# Altium PCB bmsSlavePCB_L.PcbDoc (part 3 of 3)
Units mil, origin at the board's own origin, x right, y up, seen from the top; angles counter-clockwise.
Board outline 6375 x 5335 mil, 2 copper layers (Top Layer, Bottom Layer); 224 components, 153 nets, 536 pads, 45 vias.
Unrouted connection lines stored in the file: 34.
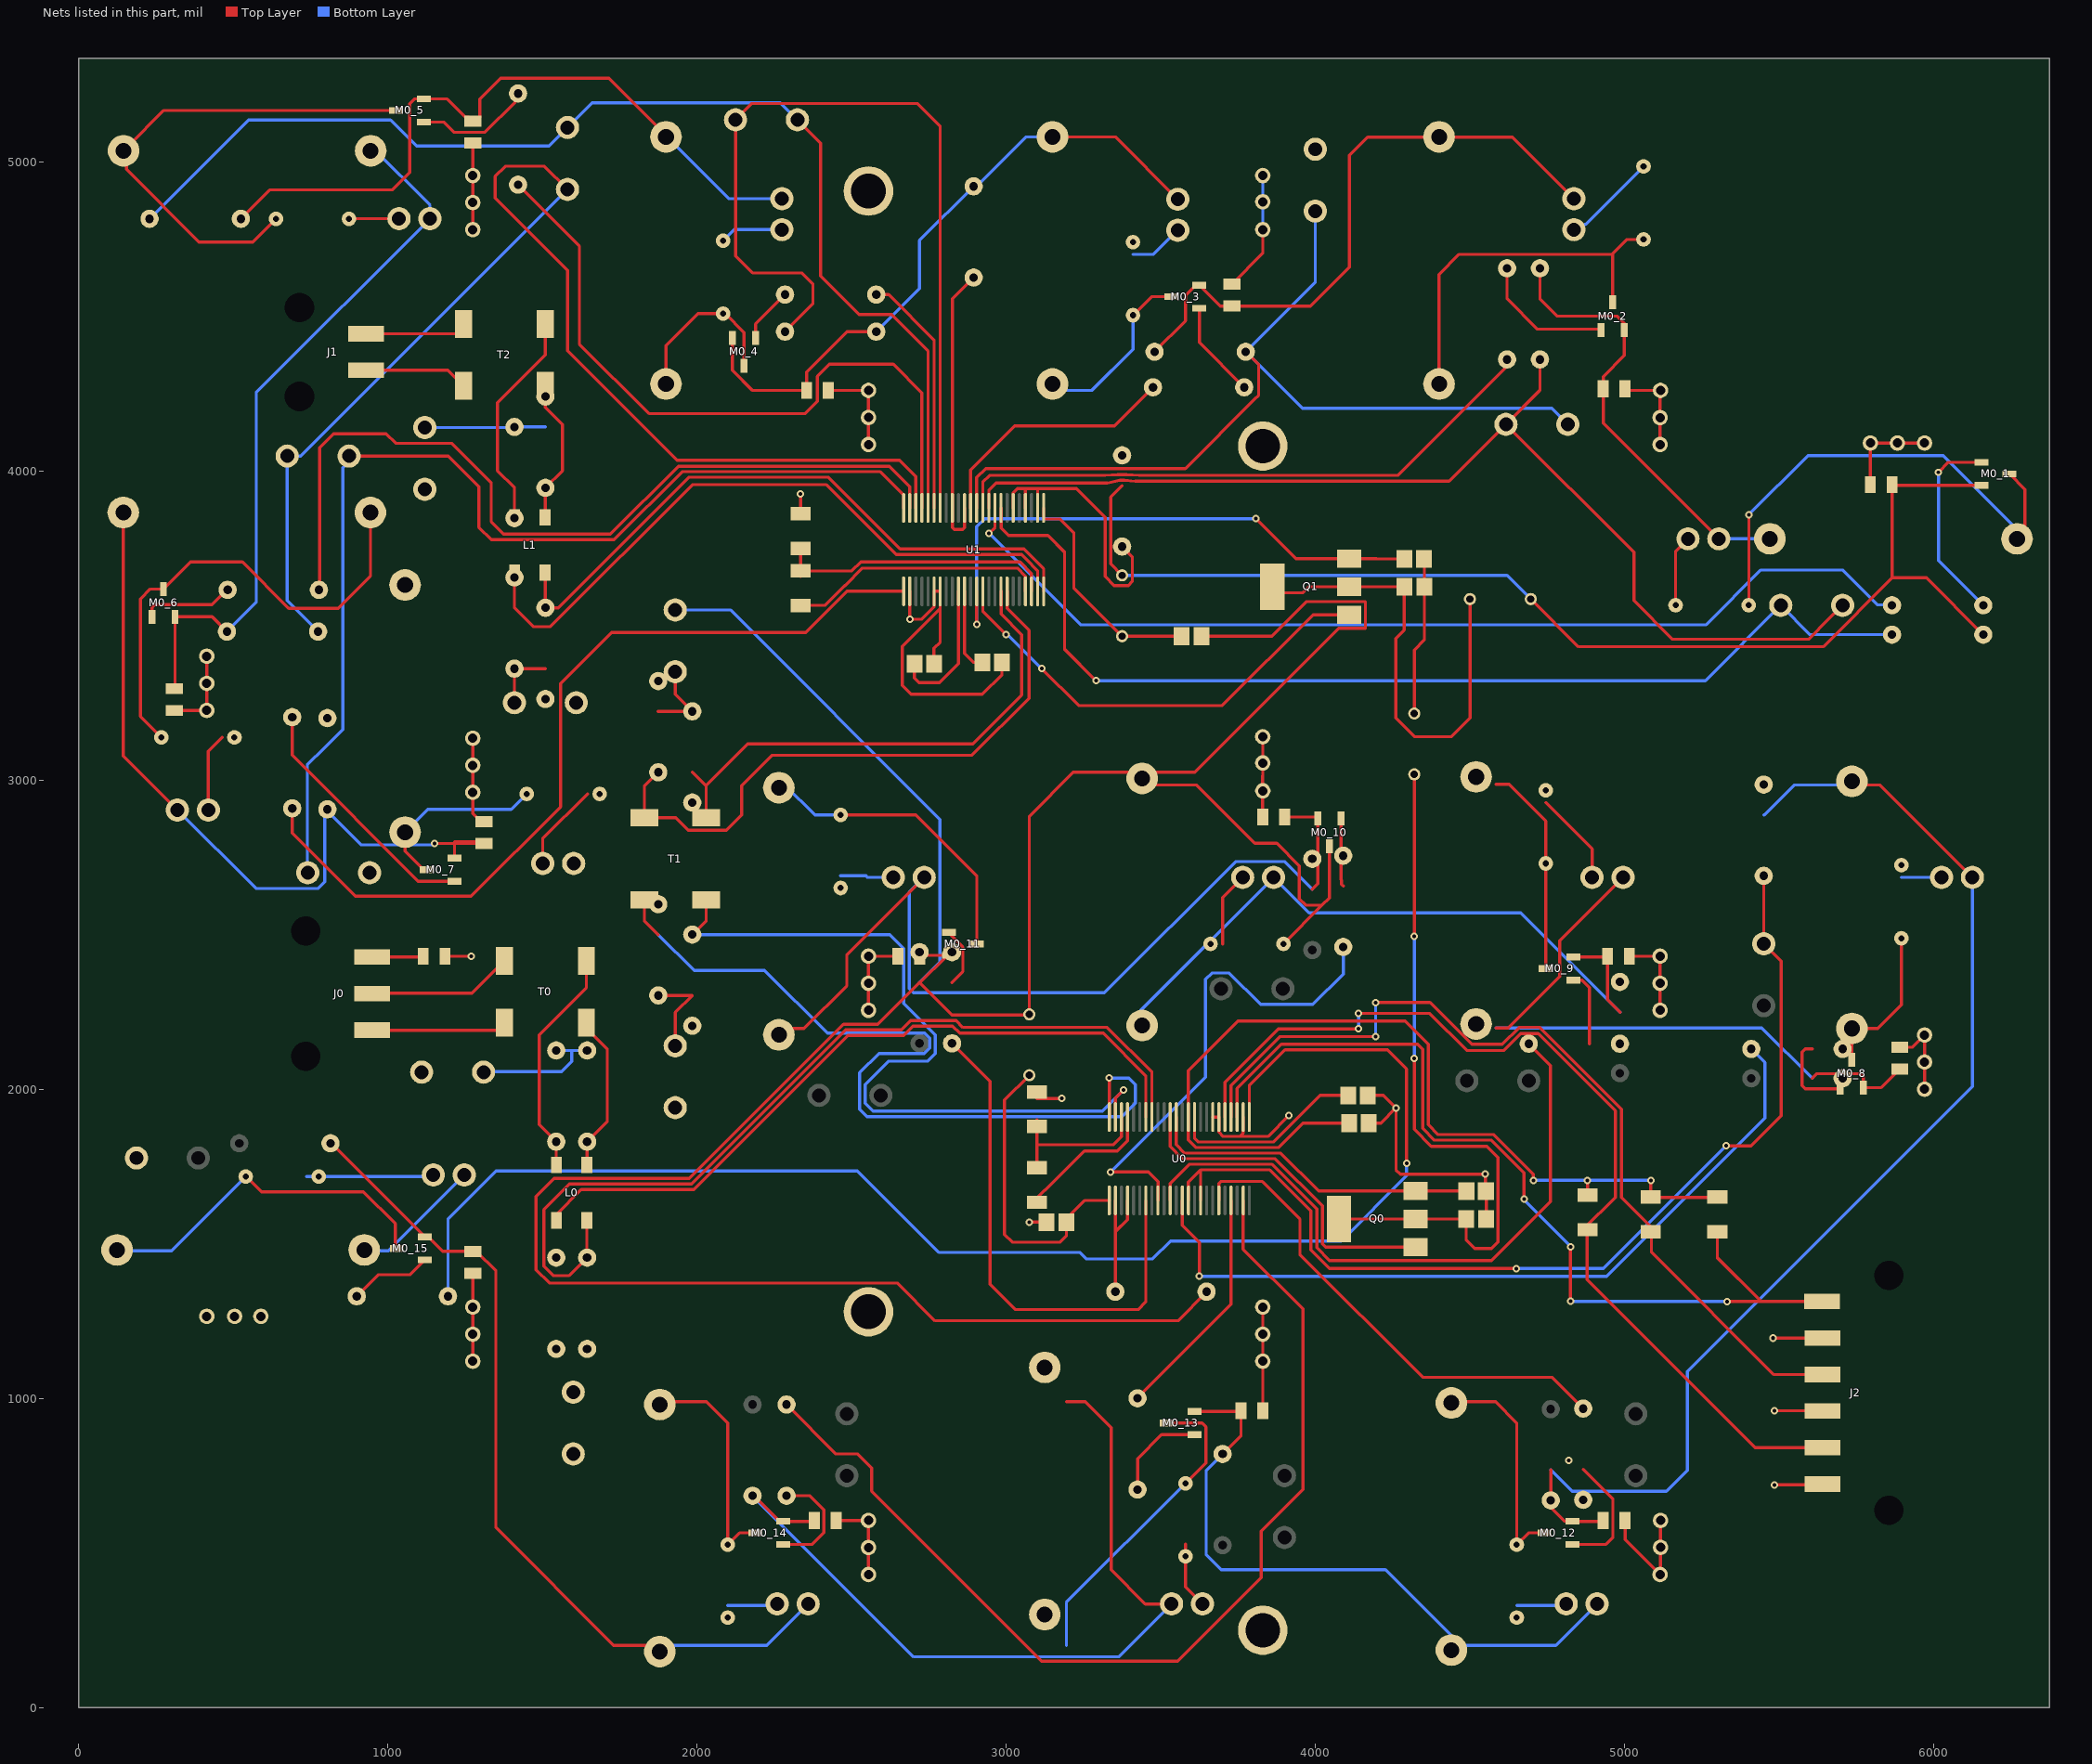
[diagram p2: the nets of this part, all layers, seen from the top]

## Via types
v1: diameter 24, hole 12, Top Layer to Bottom Layer, 45 vias

## Nets (pads, with @x,y where several pads share a name; then routed paths per layer and width w, separated by ;. In a path a pad name is that pad's centre, name@x,y a point inside that pad or via, vN(x,y) a via of type N, cw(c..) or ccw(c..) an arc to the next point about the centre after c; other vN are vias at no path point) (continued)
1-S1: R0_15.1 U0.25 | length 4671.5
  Top Layer w10: U0.25@3786.38,1909.84 3786.38,2011.38 3902,2127 4233,2127 4295,2065 v1(4295,1760)
  Bottom Layer w10: R0_15.1@1195,1330 1195,1579.25 1350.75,1735 2519,1735 2782,1472 3238,1472 3259,1451 3474,1451 3532,1509 4083.92,1509 4295,1720.08 v1(4295,1760)
1-S2: R0_14.1 U0.23 | length 3390.7
  Top Layer w10: R0_14.1@2290,980 2450,820 2520,820 2565,775 2565,700 3115,150 3555,150 3825,420 3825,570 3960,705 3960,1289.02 3766.69,1482.33 U0.23@3766.69,1640.16
1-S3: R0_13.1 U0.21 | length 764.8
  Top Layer w10: R0_13.1@3424.08,1000.92 3727.32,1304.17 U0.21@3727.32,1640.16
1-S4: R0_12.1 U0.19 | length 1607.7
  Top Layer w10: U0.19@3687.95,1640.16 3687.95,1683.47 3688.03,1683.54 3688.03,1695.53 3693.89,1701.39 3828.61,1701.39 3950,1580 3950,1465 4347,1068 4765.15,1068 R0_12.1@4866.3,966.85
1-S7: R0_8.1 U0.13 | length 2550.3
  Top Layer w10: U0.13@3569.84,1640.16 3569.84,1559.16 3625,1504 v1(3625,1395)
  Bottom Layer w10: v1(3625,1395) 4942,1395 5454,1907 5454,2086 R0_8.1@5410,2130
1-S8: R0_9.1 U0.11 | length 2131.1
  Top Layer w10: U0.11@3530.47,1640.16 3530.47,1695.47 3592.04,1757.04 3860.23,1757.04 4005,1612.27 4005,1487 4046,1446 4570,1446 4760,1636 4760,2076.85 R0_9.1@4690,2146.85
1-S9: R0_10.1 U0.9 | length 1601.3
  Top Layer w10: v1(3338,1732) 3460.1,1732 3491.1,1701 U0.9@3491.1,1640.16
  Bottom Layer w10: v1(3338,1732) 3644.74,2038.74 3644.74,2355 3665.24,2375.5 3721.5,2375.5 3823,2274 3992,2274 4090.24,2372.24 R0_10.1@4090.24,2460
1-S10: R0_11.1 U0.7 | length 1706.2
  Top Layer w10: R0_11.1@2825,2148.15 2948,2025.15 2948,1369 3030,1287 3426.54,1287 3451.73,1312.19 U0.7@3451.73,1640.16
2-C1: C0_6.1 C0_7.2 R1_7.1 U1.24 | length 3552
  Top Layer w10: C0_6.1@875,4047.61 1196.39,4047.61 1295,3949 1295,3817 1335,3777 1732,3777 1952,3997 2593,3997 2666.93,3923.07 2668.54,3923.07 2668.62,3922.99 U1.24@2668.62,3879.84
  Bottom Layer w10: C0_7.2@741.3,2700 740,2701.3 740,3048.7 796.3,3105 855,3163.7 855,4010.02 875,4030.02 C0_6.1@875,4047.61
2-C2: C0_5.1 C0_6.2 R1_6.1 U1.22 | length 4209
  Top Layer w10: C0_5.1@1581.62,4910.38 1507,4985 1380,4985 1347.36,4952.36 1347.36,4882.64 1350.29,4879.71 1582,4648 1582,4388 1936,4034 2655,4034 2707.99,3981.01 U1.22@2707.99,3879.84
  Bottom Layer w10: R1_6.1@775,3480 675,3580 C0_6.2@675,4047.61 718.84,4047.61 C0_5.1@1581.62,4910.38
2-C3: C0_4.1 C0_5.2 R1_5.1 U1.20 | length 3834.8
  Top Layer w10: C0_4.1@2325,5135 2400,5060 2400,4630 2525,4505 2630,4505 2747.36,4387.64 U1.20@2747.36,3879.84
  Bottom Layer w10: R1_5.1@230,4815 550,5135 1009,5135 1093.62,5050.38 1521.62,5050.38 C0_5.2@1581.62,5110.38 1661.23,5190 2270,5190 C0_4.1@2325,5135
2-C4: C0_4.2 R1_4.1 U1.18 | length 2867.7
  Top Layer w10: R1_4.1@2285,4450 2375,4540 2375,4604.14 2339.14,4640 2180,4640 2125,4695 C0_4.2@2125,5135 2178,5188 2713,5188 2786.73,5114.27 U1.18@2786.73,3879.84
2-C7: C0_2.1 C0_3.2 R1_3.1 U1.12 | length 2964.9
  Top Layer w10: U1.12@2904.84,3879.84 2904.84,3978 2934.31,4007.47 3579.47,4007.47 3802.69,4230.69 3816.76,4244.75 3816.76,4343.24 R1_3.1@3775,4385
  Bottom Layer w10: C0_3.2@4000,4840 4000,4610 R1_3.1@3775,4385 3958,4202 3985,4202 4764.3,4202 C0_2.1@4816.3,4150
2-C8: C0_1.1 C0_2.2 R1_2.1 U1.10 | length 3585.2
  Top Layer w10: U1.10@2944.21,3879.84 2944.21,3936.21 2968,3960 3326.32,3960 3367.54,3969.85 3382.46,3969.85 3417.68,3966 4432.3,3966 C0_2.2@4616.3,4150 ; R1_2.1@4726.3,4360 4726.3,4260 C0_2.2@4616.3,4150 ; C0_1.1@5705,3565 5661.71,3521.71 5595,3455 5155,3455 5030,3580 5030,3736.3 C0_2.2@4616.3,4150
2-C9: C0_1.2 R1_1.1 U1.8 | length 3475.2
  Top Layer w10: U1.8@2983.58,3879.84 2983.58,3815 3007.58,3791 3135,3791 3189,3737 3189,3423 v1(3291,3321)
  Bottom Layer w10: v1(3291,3321) 5261,3321 C0_1.2@5505,3565 5600,3470 R1_1.1@5865,3470
2-S1: R0_7.1 U1.25 | length 2785.5
  Top Layer w10: R0_7.1@691.3,2908.15 691.3,2827.7 895,2624 1270,2624 1559,2913 1559,3312 1724,3477 2352,3477 2486,3611 2668.62,3611 U1.25@2668.62,3610.16
2-S2: R0_6.1 U1.23 | length 2783.4
  Top Layer w10: R0_6.1@777.5,3615 780,3617.5 780,4075 825,4120 995,4120 1026,4089 1206,4089 1335,3960 1335,3835 1375,3795 1720,3795 1940,4015 2622.31,4015 2688.31,3949 U1.23@2688.31,3879.84
2-S3: R0_5.1 U1.21 | length 2323.1
  Top Layer w10: R0_5.1@1421.61,4925.38 1620,4727 1620,4410 1845,4185 2350,4185 2389,4224 2389,4305.21 2428.79,4345 2635,4345 2727.68,4252.32 U1.21@2727.68,3879.84
2-S4: R0_4.1 U1.19 | length 786.1
  Top Layer w10: R0_4.1@2585,4570 2620,4570 2767.05,4422.95 U1.19@2767.05,3879.84
2-S7: R0_3.1 U1.13 | length 823.7
  Top Layer w10: U1.13@2885.16,3879.84 2885.16,4003.16 3027,4145 3350,4145 R0_3.1@3475,4270
2-S8: R0_2.1 U1.11 | length 1964.6
  Top Layer w10: U1.11@2924.53,3879.84 2924.53,3963.12 2946.41,3985 3320.17,3985 3360.09,3987.85 3389.91,3987.85 3429.83,3985 4266.3,3985 R0_2.1@4641.3,4360
2-S9: R0_1.1 U1.9 | length 3252.8
  Top Layer w10: v1(2945,3798) 2963.9,3816.9 U1.9@2963.9,3879.84
  Bottom Layer w10: v1(2945,3798) 3241,3502 5264,3502 5441,3679 5704.15,3679 5816.58,3566.58 5863.42,3566.58 R0_1.1@5865,3565
GPIO1: J2.1 R35.1 U0.27 | length 2976.9
  Top Layer w10: U0.27@3747.01,1909.84 3747.01,2002.01 3890,2145 4330.36,2145 4347,2128.36 4347,1873 4385,1835 4569.54,1835 4675,1729.54 v1(4675,1645) ; v1(4825,1490) 4825.24,1489.76 4825.24,1314.76 v1(4825.47,1314.53) ; R35.1@5300,1538.9 5300,1455 5441.89,1313.11 ; v1(5331.89,1313.11) 5441.89,1313.11 ; J2.1@5638.82,1313.11 5441.89,1313.11
  Bottom Layer w10: v1(4675,1645) 4675,1642.5 4825,1492.5 v1(4825,1490) ; v1(4825.47,1314.53) 4826.18,1313.82 5331.18,1313.82 v1(5331.89,1313.11)
GPIO2: J2.3 R36.1 U0.28 | length 2967.4
  Top Layer w10: U0.28@3727.32,1909.84 3727.32,2012.32 3885,2170 v1(4195,2170) ; v1(4195,2280) 4370.86,2280 4505.86,2145 4604.54,2145 4659.54,2200 4725.46,2200 4990,1935.46 4990,1650 R36.1@5095.06,1544.94 ; R36.1@5070.31,1553.59 R36.1@5085,1538.9 5087,1536.89 5087,1472.89 5483,1076.89 J2.3@5640,1076.89
  Bottom Layer w10: v1(4195,2170) v1(4195,2280)
GPIO3: J2.5 R37.1 U0.29 | length 3263.4
  Top Layer w10: U0.29@3707.64,1909.84 3707.64,2022.64 3880,2195 v1(4140,2195) ; v1(4140,2245) 4370,2245 4490,2125 4610,2125 4664.54,2179.54 4720.46,2179.54 4970,1930 4970,1650 R37.1@4867.5,1547.5 ; R37.1@4880,1545.51 4879.26,1544.77 4879.26,1383.74 5422.33,840.67 J2.5@5640,840.67 ; R37.1@4883.22,1545.49 R37.1@4896.31,1558.57
  Bottom Layer w10: v1(4140,2195) v1(4140,2245)
IMA-1: L0.1 R9.1 U0.41 | length 2914.5
  Top Layer w10: L0.1@1644.21,1575.43 1644.21,1455.79 R9.1@1645,1455 1587,1397 1535,1397 1505,1427 1505,1610 1588,1693 1982.54,1693 2481.54,2192 2661.54,2192 2691.54,2222 2838,2222 2860,2200 3326.42,2200 3471.42,2055 U0.41@3471.42,1909.84
IMA-2: R39.2 T1.3 U1.41 | length 1685.9
  Top Layer w10: 1985,3025 2028.5,2981.5 ; T1.3@2044,2877.5 T1.3@2030,2877.5 2030,2980 2028.5,2981.5 ; U1.41@2983.58,3610.16 2983.58,3536.42 3050,3470 3050,3275 2892,3117 2164,3117 2028.5,2981.5
IMB-1: R33.1 T1.2 U0.47 | length 2518.2
  Top Layer w10: R33.1@1985,2500 2030,2545 T1.2@2030,2612.5 ; U0.47@3353.31,1909.84 3353.31,1971.31 v1(3380,1998)
  Bottom Layer w10: R33.1@1985,2500 2624,2500 2669,2455 2669,2276.69 2770.69,2175 2770.69,2115 2745.98,2090.29 2619.29,2090.29 2544,2015 2544,1955 2569.5,1929.5 3311.5,1929.5 v1(3380,1998)
IMB-2: L1.4 R11.2 U1.47 | length 2203.4
  Top Layer w10: L1.4@1410.79,3670.43 1410,3669.65 1410,3556.85 1470.85,3496 1526,3496 1985,3955 2418.91,3955 2644.91,3729 3050.54,3729 3065.27,3714.27 3065.27,3713.84 3101.69,3677.42 U1.47@3101.69,3610.16
In1-A: J0.2 T0.1 | length 471.4
  Top Layer w10: J0.2@950,2309.06 950.94,2310 1272.5,2310 T0.1@1377.5,2415
In1-B: J0.1 T0.2 | length 430.9
  Top Layer w10: J0.1@958.46,2190 1355,2190 1377.5,2212.5 T0.2@1377.5,2215
IPA-1: L0.4 R8.2 U0.42 | length 2377.5
  Top Layer w10: L0.4@1545.79,1575.43 1545.79,1594.79 1626,1675 1990,1675 2489,2174 2669,2174 2699,2204 2826.84,2204 2850,2180.84 3313.9,2180.84 3451.73,2043 U0.42@3451.73,1909.84
IPA-2: R38.1 T1.4 U1.42 | length 2034.3
  Top Layer w10: R38.1@1875,3025 1830,2980 T1.4@1830,2877.5 1931.5,2877.5 1972,2837 2095,2837 2145.16,2887.16 2145.16,2981.16 2244,3080 2890,3080 3074,3264 3074,3484 3003.27,3554.73 U1.42@3003.27,3610.16
IPB-1: R32.2 T1.1 U0.48 | length 2757.3
  Top Layer w10: T1.1@1830,2612.5 1830,2545 1875,2500 ; U0.48@3333.62,1909.84 v1(3333.62,2036)
  Bottom Layer w10: 1875,2500 1991,2384 2219,2384 2422.16,2180.84 2736.85,2180.84 2752.69,2165 2752.69,2133.15 2735,2115.46 2588.46,2115.46 2526,2053 2526,1935 2550,1911 3375,1911 3418,1954 3418,2015 3397,2036 v1(3333.62,2036)
IPB-2: L1.1 R10.1 U1.48 | length 2096
  Top Layer w10: L1.1@1509.21,3670.43 1510,3669.65 R10.1@1510,3556.85 1551.85,3556.85 1974,3979 2426,3979 2657.39,3747.61 3057.39,3747.61 3121.38,3683.62 U1.48@3121.38,3610.16
NetC0_2: C0.2 R0.1 U0.1 | length 985.4
  Top Layer w10: R0.1@3075,2045 2995,1965 2995,1530 3020,1505 3175,1505 3195,1525 3195,1580.16 3255,1640.16 U0.1@3333.62,1640.16
NetC0_3_1: C0_3.1
NetC1_1: C1.1 Q0.2 Q0.4 R3.1 | length 2332.5
  Top Layer w10: Q0.4@4075.98,1580 Q0.2@4324.02,1580 C1.1@4487.52,1580 4487.52,1512.48 4515,1485 4570,1485 4591.07,1506.07 4591.07,1778.93 4555,1815 4375,1815 4320,1870 v1(4320,2100) ; v1(4320,2495) R3.1@4320,3018.15
  Bottom Layer w10: v1(4320,2100) v1(4320,2495)
NetC2_2: C2.2 Q0.3 U0.37 | length 1090.1
  Top Layer w10: U0.37@3550.16,1909.84 3550.16,1820.3 3577.41,1793.04 3888.25,1793.04 4010.75,1670.55 Q0.3@4324.02,1670.55 4487.95,1670.55 C2.2@4488.5,1670
NetC4_2: C4.2 U0.34 | length 634
  Top Layer w10: U0.34@3609.21,1909.84 3609.21,1841.24 3621.41,1829.04 3864.04,1829.04 4015,1980 C4.2@4107.01,1980
NetC14_1: C14.1 R32.1 R33.2 | length 295.9
  Top Layer w10: R32.1@1875,2303.15 1985,2303.15 1930,2248.15 C14.1@1930,2140
NetC16_2: C16.2 R38.2 R39.1 | length 260.9
  Top Layer w10: 1875,3221.85 R39.1@1985,3221.85 1930,3276.85 C16.2@1930,3350
NetC17_2: C17.2 R41.1 U1.1 | length 743.8
  Top Layer w10: U1.1@3121.38,3879.84 3121.38,3844 3175,3844 3219,3800 3219,3621 R41.1@3375,3465 C17.2@3567.52,3465
NetC18_1: C18.1 Q1.2 Q1.4 R43.1 | length 1565.6
  Top Layer w10: Q1.4@3860.98,3625 3860.98,3605.22 3959.21,3605.22 3978.99,3625 Q1.2@4109.02,3625 C18.1@4287.52,3625 4287.52,3485.05 4260,3457.53 4260,3200 4320,3140 4440,3140 4500,3200 R43.1@4500,3585
NetC19_2: C19.2 Q1.3 U1.37 | length 1871.3
  Top Layer w10: v1(2904.84,3503) U1.37@2904.84,3610.16 ; v1(3808,3845) 3937.45,3715.55 Q1.3@4109.02,3715.55 4198,3715.55 4198.55,3715 C19.2@4288.5,3715
  Bottom Layer w10: v1(2904.84,3503) 2904.84,3818.84 2931,3845 v1(3808,3845)
NetC20_2: C20.2 U1.35 | length 270.9
  Top Layer w10: U1.35@2865.47,3610.16 2865.47,3409.53 2895,3380 C20.2@2923.5,3380
NetC21_2: C21.2 U1.34 | length 453.5
  Top Layer w10: C21.2@2703.5,3375 2703.5,3329.28 2717.79,3315 2785,3315 2845.79,3375.79 U1.34@2845.79,3610.16
NetC22_2: C22.2 R6.1 R7.2 | length 434.5
  Bottom Layer w10: C22.2@1310,2055 1311.85,2056.85 1561.85,2056.85 1595,2090 1595,2125 ; R6.1@1545,2125 1595,2125 ; R7.2@1645,2125 1595,2125
NetC23_2: C23.2 R8.1 R9.2 | length 2.2
  Bottom Layer w10: R9.2@1643.43,1166.58 R9.2@1645,1168.15
NetC24_2: C24.2 R10.2 R11.1 | length 210
  Top Layer w10: C24.2@1410,3250 R11.1@1410,3360 1510,3360
NetC25_2: C25.2 R12.2 R13.1 | length 390.8
  Bottom Layer w10: C25.2@1120,4140 1408.15,4140 R13.1@1410,4141.85 1510,4141.85
NetD0_1_1: D0_1.1 R3_1.2 | length 231.6
  Top Layer w10: R3_1.2@5165,3565 5165,3740 D0_1.1@5205,3780
NetD0_1_2: D0_1.2 F0_2.1 M0_2.2 R1_2.2 R2_1.1 | length 1440.2
  Top Layer w10: R1_2.2@4726.3,4655 4726.3,4556.85 4783.15,4500 4976.3,4500 4998.7,4477.6 M0_2.2@4998.7,4455 4998.7,4372.64 4931.06,4305 F0_2.1@4931.06,4265 4931.06,4153.94 D0_1.2@5305,3780
  Bottom Layer w10: D0_1.2@5305,3780 R2_1.1@5461.3,3780
NetD0_2_1: D0_2.1 R3_2.2 | length 309.7
  Bottom Layer w10: D0_2.1@4836.3,4780 4853.89,4780 4870.7,4796.81 4873.74,4796.81 R3_2.2@5061.3,4984.37
NetD0_2_2: D0_2.2 F0_3.1 M0_3.2 R1_3.2 R2_2.1 | length 2041.9
  Top Layer w10: R1_3.2@3480,4385 3580,4485 3580,4567.05 3613.5,4600.55 M0_3.2@3625,4600.55 3692.64,4532.91 F0_3.1@3730,4532.91 3983.91,4532.91 4110,4659 4110,5020 4169.21,5079.21 4395,5079.21 4637.09,5079.21 D0_2.2@4836.3,4880
NetD0_3_1: D0_3.1 R3_3.2 | length 177.4
  Bottom Layer w10: 3410,4700 3476.85,4700 D0_3.1@3555,4778.15
NetD0_3_2: D0_3.2 F0_4.1 M0_4.2 R1_4.2 R2_3.1 R58.2 | length 2109
  Top Layer w10: M0_4.2@2115,4430 2115,4325 2180,4260 F0_4.1@2354.76,4260 2355,4260.24 2355,4320 2485,4450 R1_4.2@2580,4450 ; R2_3.1@3199.03,5080 3353.15,5080 D0_3.2@3555,4878.15
  Bottom Layer w10: R1_4.2@2580,4450 2720,4590 2720,4745 R58.2@2895,4920 ; R58.2@2900,4915 3065,5080 R2_3.1@3150,5080 ; R2_3.1@3155,5086.85 R2_3.1@3195,5086.85
NetD0_4_1: D0_4.1 R3_4.2 | length 204.9
  Bottom Layer w10: R3_4.2@2084.69,4744.69 2120,4780 D0_4.1@2275,4780
NetD0_4_2: D0_4.2 F0_5.1 M0_5.2 R1_5.2 R2_4.1 | length 2301.1
  Top Layer w10: R1_5.2@525,4815 618.38,4908.38 1014.62,4908.38 1071.62,4965.38 1071.62,5187.79 1086.62,5202.79 M0_5.2@1116.62,5202.79 1192.21,5202.79 1251.77,5143.23 1262.24,5143.23 F0_5.1@1275,5130.47 1284.74,5130.47 1297.5,5143.23 1297.5,5202.5 1365,5270 1715,5270 1900,5085 R2_4.1@1900,5080
  Bottom Layer w10: R2_4.1@1920,5063.7 2103.7,4880 D0_4.2@2275,4880
NetD0_5_1: D0_5.1 R3_5.2 | length 153.6
  Top Layer w10: R3_5.2@883.05,4815.38 D0_5.1@1036.62,4815.38
NetD0_5_2: D0_5.2 F0_6.1 M0_6.2 R1_6.2 R2_5.1 | length 2335.2
  Top Layer w10: F0_6.1@310,3295.24 312.4,3297.64 M0_6.2@312.4,3527.61 432.39,3527.61 R1_6.2@480,3480
  Bottom Layer w10: R1_6.2@480,3480 575,3575 575,4253.77 D0_5.2@1136.62,4815.38 1136.62,4859.08 R2_5.1@950.32,5045.38
NetD0_6_1: D0_6.1 R3_6.2 | length 253.6
  Top Layer w10: D0_6.1@420,2902.61 420,3092.61 465,3137.61
NetD0_6_2: D0_6.2 F0_7.1 M0_7.2 R1_7.2 R2_6.1 | length 2578.6
  Top Layer w10: R2_6.1@145,3865 145,3077.61 D0_6.2@320,2902.61 ; v1(1151.06,2794.76) 1216.3,2794.76 ; M0_7.2@1216.3,2747.4 1216.3,2794.76 ; 1216.3,2794.76 F0_7.1@1311.3,2794.76 1306.06,2800 1216.3,2800 1216.3,2794.76
  Bottom Layer w10: D0_6.2@320,2902.61 573.61,2649 775,2649 796.3,2670.3 796.3,2810 796.3,2908.15 914.45,2790 1146.3,2790 v1(1151.06,2794.76)
NetD0_7_1: D0_7.1 R3_7.2 | length 285.1
  Top Layer w10: D0_7.1@1501.3,2730 1501.3,2810 1646.3,2955
NetD0_8_1: D0_8.1 R3_8.2 | length 130
  Bottom Layer w10: 5895,2685 D0_8.1@6025,2685
NetD0_8_2: D0_8.2 F0_12.1 M0_12.2 R1_12.2 R2_8.1 R14.2 | length 3949.8
  Top Layer w10: 4761.3,768.15 4761.3,647.4 4806.3,602.4 M0_12.2@4831.3,602.4 4831.3,602 4931.06,602 F0_12.1@4931.06,605 ; R2_8.1@5735,2983.7 5826.3,2983.7 D0_8.2@6125,2685
  Bottom Layer w10: 4761.3,768.15 4830.45,699 5135,699 5203,767 5203,1087 6125,2009 D0_8.2@6125,2685 ; 5450,2886.85 5451.85,2886.85 5548.7,2983.7 R2_8.1@5735,2983.7
NetD0_9_1: D0_9.1 R3_9.2 | length 304
  Top Layer w10: 4745,2926.85 4895,2776.85 D0_9.1@4895,2685
NetD0_9_2: D0_9.2 F0_8.1 M0_8.2 R1_8.2 R2_9.1 | length 2122.4
  Top Layer w10: 4585,2198.15 4624.34,2198.15 4790,2363.81 4790,2480 D0_9.2@4995,2685 ; 5606.85,2035 5621.85,2050 5762.4,2050 5772.4,2040 M0_8.2@5772.4,2005 5830.24,2005 F0_8.1@5890,2064.76
  Bottom Layer w10: 4585,2198.15 5443.7,2198.15 5606.85,2035
NetD0_10_1: D0_10.1 R3_10.2 | length 241.8
  Top Layer w10: 3700.24,2470 3700.24,2620.24 D0_10.1@3765,2685
NetD0_10_2: D0_10.2 F0_9.1 M0_9.2 R1_9.2 R2_10.1 | length 2276.2
  Top Layer w10: M0_9.2@4835,2427.4 4942.17,2427.4 F0_9.1@4944.76,2430 4945,2427.4 4945,2288.7 4985,2248.7
  Bottom Layer w10: R2_10.1@3435.24,2196.3 3435.24,2255.24 D0_10.2@3865,2685 3980,2570 4663.7,2570 4985,2248.7
NetD0_11_1: D0_11.1 R3_11.2 | length 172.1
  Bottom Layer w10: 2465,2690 2547,2690 2552,2685 D0_11.1@2635,2685
NetD0_11_2: D0_11.2 F0_10.1 M0_10.2 R1_10.2 R2_11.1 | length 2957.2
  Top Layer w10: R2_11.1@2285,2196.3 2346.3,2196.3 2485,2335 2485,2435 D0_11.2@2735,2685 ; F0_10.1@3900.24,2880 4002.83,2880 M0_10.2@4007.83,2875 4007.83,2664.45 3990.24,2646.85
  Bottom Layer w10: D0_11.2@2735,2685 2687,2637 2687,2325 2700,2312 3318,2312 3742,2736 3901.09,2736 3990.24,2646.85
NetD0_12_1: D0_12.1 R3_12.2 | length 162.1
  Bottom Layer w10: 4651.3,330 4806.3,330 D0_12.1@4811.3,335
NetD0_12_2: D0_12.2 F0_13.1 M0_13.2 R1_13.2 R2_12.1 | length 2119.8
  Top Layer w10: M0_13.2@3610,957.4 3757.17,957.4 F0_13.1@3759.76,960 ; R1_13.2@3700,820 3759.76,879.76 F0_13.1@3759.76,955
  Bottom Layer w10: R1_13.2@3714.36,834.36 3647,767 3647,494 3695,446 4226.6,446 4471.3,201.3 4777.6,201.3 D0_12.2@4911.3,335
NetD0_13_1: D0_13.1 R3_13.2 | length 215.9
  Top Layer w10: 3580,528.15 3580,390 D0_13.1@3635,335
NetD0_13_2: D0_13.2 F0_14.1 M0_14.2 R1_14.2 R2_13.1 | length 2759
  Top Layer w10: R1_14.2@2180,685 2185.67,685 2268.26,602.4 M0_14.2@2279.76,602.4 2279.76,602 2379.53,602 F0_14.1@2379.53,605 ; 3195,988.7 3256.3,988.7 3340,905 3340,445 3450,335 D0_13.2@3535,335
  Bottom Layer w10: R1_14.2@2180,685 2701,164 3364,164 D0_13.2@3535,335
NetD0_14_1: D0_14.1 R3_14.2 | length 162.1
  Bottom Layer w10: 2099.76,330 2254.76,330 D0_14.1@2259.76,335
NetD0_14_2: D0_14.2 F0_15.1 M0_15.2 R1_15.2 R2_14.1 | length 2763.1
  Top Layer w10: R1_15.2@815,1825 817.93,1825 1112.91,1530.02 1112.91,1523.4 1118.91,1517.4 1135.16,1517.4 1177.32,1475.24 F0_15.1@1275,1475.24 ; F0_15.1@1275,1474.8 1288,1474.8 1350,1412.8 1350,582 1730.7,201.3 R2_14.1@1919.76,201.3
  Bottom Layer w10: R2_14.1@1919.76,201.3 2226.06,201.3 D0_14.2@2359.76,335
NetD0_15_1: D0_15.1 R3_15.2 | length 412.1
  Bottom Layer w10: 737.6,1717.4 1142.6,1717.4 D0_15.1@1147.6,1722.4
NetF0_1: F0.1 J0.3 | length 169.9
  Top Layer w10: J0.3@952.83,2430 J0.3@950,2427.17 1111.93,2427.17 F0.1@1114.76,2430
NetF0_1_2: F0_1.2 J0_1.0 J1_1.0 J2_1.0 | length 310.1
  Top Layer w10: F0_1.2@5794.76,3955 5795,3955.24 J2_1.0@5795,4090 J1_1.0@5882.5,4090 J0_1.0@5970,4090
NetF0_2_2: F0_2.2 J0_2.0 J1_2.0 J2_2.0 | length 295.3
  Top Layer w10: F0_2.2@5001.54,4265 5001.54,4260 J0_2.0@5116.3,4260 5115,4258.7 J2_2.0@5115,4085
NetF0_3_2: F0_3.2 J0_3.0 J1_3.0 J2_3.0 | length 393
  Top Layer w10: F0_3.2@3730,4603.39 3830,4703.39 J0_3.0@3830,4780
  Bottom Layer w10: J0_3.0@3830,4780 J1_3.0@3830,4870 J2_3.0@3830,4955
NetF0_4_2: F0_4.2 J0_4.0 J1_4.0 J2_4.0 | length 311.8
  Top Layer w10: F0_4.2@2420.24,4265 F0_4.2@2425.24,4260 J0_4.0@2555,4260 J2_4.0@2555,4085
NetF0_5_2: F0_5.2 J0_5.0 J1_5.0 J2_5.0 | length 280
  Top Layer w10: J0_5.0@1275,4780 J1_5.0@1275,4867.5 J2_5.0@1275,4955 F0_5.2@1275,5060
NetF0_6_2: F0_6.2 J0_6.0 J1_6.0 J2_6.0 | length 280.1
  Top Layer w10: F0_6.2@310,3224.76 362,3224.76 362.24,3225 J2_6.0@415,3225 J0_6.0@415,3400
NetF0_7_2: F0_7.2 J0_7.0 J1_7.0 J2_7.0 | length 290.5
  Top Layer w10: J2_7.0@1275,3135 J0_7.0@1275,2960 1275,2891.79 1301.55,2865.24 F0_7.2@1311.3,2865.24
NetF0_8_2: F0_8.2 J0_8.0 J1_8.0 J2_8.0 | length 271.5
  Top Layer w10: F0_8.2@5890,2135.24 5930.24,2135.24 J2_8.0@5970,2175 J0_8.0@5970,2000
NetF0_9_2: F0_9.2 J0_9.0 J1_9.0 J2_9.0 | length 274.8
  Top Layer w10: F0_9.2@5015.24,2430 J0_9.0@5115,2430 J2_9.0@5115,2255
NetF0_10_2: F0_10.2 J0_10.0 J1_10.0 J2_10.0 | length 344.9
  Top Layer w10: J0_10.0@3829.88,3139.88 3829.88,3065.88 3829.82,2964.88 F0_10.2@3829.76,2880 3830.12,2880.35 J2_10.0@3830.12,2964.88
NetF0_11_2: F0_11.2 J0_11.0 J1_11.0 J2_11.0 | length 269.8
  Top Layer w10: J2_11.0@2555,2255 J0_11.0@2555,2430 F0_11.2@2649.76,2430
NetF0_12_2: F0_12.2 J0_12.0 J1_12.0 J2_12.0 | length 397.5
  Top Layer w10: F0_12.2@5001.54,605 5001.54,543.46 J2_12.0@5115,430 5116.3,431.3 J0_12.0@5116.3,605
NetF0_13_2: F0_13.2 J0_13.0 J1_13.0 J2_13.0 | length 340.1
  Top Layer w10: J2_13.0@3830,1295 J0_13.0@3830,1120 3830,955.24 F0_13.2@3830.24,955
NetF0_14_2: F0_14.2 J0_14.0 J1_14.0 J2_14.0 | length 279.9
  Top Layer w10: F0_14.2@2450,605 J0_14.0@2554.76,605 2555,604.76 J2_14.0@2555,430
NetF0_15_2: F0_15.2 J0_15.0 J1_15.0 J2_15.0 | length 284.8
  Top Layer w10: J2_15.0@1275,1120 J0_15.0@1275,1295 F0_15.2@1275,1404.77
NetL0_2: L0.2 R7.1 T0.3 | length 515.6
  Top Layer w10: T0.3@1642.5,2215 1642.5,2197.5 1710,2130 1710,1895 R7.1@1645,1830 1645,1755.35 L0.2@1644.21,1754.57
NetL0_3: L0.3 R6.2 T0.4 | length 746.7
  Top Layer w10: L0.3@1545.79,1754.57 1545,1755.35 R6.2@1545,1830 1490,1885 1490,2175 1642.5,2327.5 T0.4@1642.5,2415
NetL1_2: L1.2 R12.1 T2.1 | length 471.3
  Top Layer w10: L1.2@1509.21,3849.57 1510,3850.35 R12.1@1510,3945 1565,4000 1565,4150 1510,4205 T2.1@1510,4275
NetL1_3: L1.3 R13.2 T2.2 | length 712.7
  Top Layer w10: L1.3@1410.79,3849.57 1410,3850.35 1410,3945 1355,4000 1355,4220 1510,4375 T2.2@1510,4475
NetM0_1_1: M0_1.1 R0_1.2 | length 643.5
  Top Layer w10: v1(6015,3995) 6047.4,4027.4 M0_1.1@6155,4027.4
  Bottom Layer w10: v1(6015,3995) 6015,3710 R0_1.2@6160,3565
NetM0_1_3: M0_1.3 R2_1.2 R3_1.1 | length 1610.6
  Top Layer w10: R3_1.1@5401.85,3565 v1(5401.85,3858) ; M0_1.3@6245,3990 6295,3940 6295,3781.77 R2_1.2@6296.77,3780
  Bottom Layer w10: v1(5401.85,3858) 5592.85,4049 6030,4049 R2_1.2@6297.89,3781.11
NetM0_2_1: M0_2.1 R0_2.2 | length 446.3
  Top Layer w10: R0_2.2@4620,4655 4620,4556.3 4718.3,4458 4923.9,4458 M0_2.1@4923.9,4455
NetM0_2_3: M0_2.3 R2_2.2 R3_2.1 | length 1215
  Top Layer w10: R2_2.2@4400,4280.79 4400,4635 4465,4700 4961.3,4700 ; 4960,4700 5008.15,4748.15 R3_2.1@5061.3,4748.15 ; M0_2.3@4961.3,4545 4961.3,4696.3
NetM0_3_1: M0_3.1 R0_3.2 | length 315.8
  Top Layer w10: M0_3.1@3625,4525.75 3625,4415 R0_3.2@3770,4270
NetM0_3_3: M0_3.3 R2_3.2 R3_3.1 | length 570.3
  Top Layer w10: R3_3.1@3410,4503.15 3470,4563.15 M0_3.3@3535,4563.15
  Bottom Layer w10: R2_3.2@3155,4260.79 3155.79,4260 3276.85,4260 3410,4393.15 R3_3.1@3410,4503.15
NetM0_4_1: M0_4.1 R0_4.2 | length 179.4
  Top Layer w10: M0_4.1@2189.8,4430 2189.8,4474.8 R0_4.2@2285,4570
NetM0_4_3: M0_4.3 R2_4.2 R3_4.1 | length 552
  Top Layer w10: R2_4.2@1900,4280.79 1900,4405 2003.15,4508.15 R3_4.1@2085,4508.15 2091.85,4508.15 2152.4,4447.6 M0_4.3@2152.4,4340
NetM0_5_1: M0_5.1 R0_5.2 | length 381.6
  Top Layer w10: M0_5.1@1116.62,5127.98 1180.57,5127.98 1213.55,5095 1315,5095 1412.23,5192.23 1412.23,5211 R0_5.2@1421.61,5220.38
NetM0_5_3: M0_5.3 R2_5.2 R3_5.1 | length 1610.8
  Top Layer w10: R3_5.1@638.78,4815 563.78,4740 390,4740 155.32,4974.68 155.32,5025.46 R2_5.2@145.79,5035 159.54,5048.76 276.17,5165.38 M0_5.3@1026.62,5165.38
NetM0_6_1: M0_6.1 R0_6.2 | length 301.4
  Top Layer w10: M0_6.1@237.6,3527.61 237.6,3557.99 246.22,3566.61 431.61,3566.61 480,3615 R0_6.2@485,3615
NetM0_6_3: M0_6.3 R2_6.2 R3_6.1 | length 1580.6
  Top Layer w10: R3_6.1@268.15,3137.61 200,3205.76 200,3585 232.61,3617.61 M0_6.3@275,3617.61 362.39,3705 530,3705 680,3555 840,3555 944.21,3659.21 R2_6.2@944.21,3865
NetM0_7_1: M0_7.1 R0_7.2 | length 816.9
  Top Layer w10: R0_7.2@691.3,3203.15 691.3,3080 1098.7,2672.6 M0_7.1@1216.3,2672.6
NetM0_7_3: M0_7.3 R2_7.2 R3_7.1 | length 600.5
  Top Layer w10: R2_7.2@1056.3,2831.3 1056.3,2770 1116.3,2710 M0_7.3@1126.3,2710
  Bottom Layer w10: R2_7.2@1056.3,2831.3 1130,2905 1399.45,2905 R3_7.1@1449.45,2955
NetM0_8_1: M0_8.1 R0_8.2 | length 277.1
  Top Layer w10: 5606.85,2130 5584,2130 5574,2120 5574,2012 5585,2001 5697.6,2001 M0_8.1@5697.6,2005
NetM0_8_3: M0_8.3 R2_8.2 R3_8.1 | length 508.6
  Top Layer w10: M0_8.3@5735,2095 R2_8.2@5735,2196.3 5819,2196.3 5895,2272.3 R3_8.1@5895,2488.15
NetM0_9_1: M0_9.1 R0_9.2 | length 243.3
  Top Layer w10: M0_9.1@4835,2352.6 4862.4,2352.6 4886.85,2328.15 4886.85,2146.85
NetM0_9_3: M0_9.3 R2_9.2 R3_9.1 | length 686
  Top Layer w10: 4585,2985.55 4626.3,2985.55 4745,2866.85 R3_9.1@4745,2730 M0_9.3@4745,2390
NetM0_10_1: M0_10.1 R0_10.2 | length 221.3
  Top Layer w10: M0_10.1@4082.64,2875 4082.64,2677.39 4084.62,2675.41 4084.62,2662.47 4090.24,2656.85
NetM0_10_3: M0_10.3 R2_10.2 R3_10.1 | length 1186.8
  Top Layer w10: R2_10.2@3435.24,2983.7 3615.68,2983.7 3804.38,2795 3875.24,2795 3948.39,2721.85 3948.39,2615 3968.39,2595 4022.09,2595 ; R3_10.1@3897.09,2470 4022.09,2595 ; M0_10.3@4045.24,2785 4045.24,2618.15 4022.09,2595
NetM0_11_1: M0_11.1 R0_11.2 | length 185.6
  Top Layer w10: M0_11.1@2820.34,2499.66 2860,2460 2860,2380 2825,2345
NetM0_11_3: M0_11.3 R2_11.2 R3_11.1 | length 961.7
  Top Layer w10: R3_11.1@2465,2886.85 2708.15,2886.85 2905,2690 2905,2685 2905,2475 M0_11.3@2905,2470
  Bottom Layer w10: R2_11.2@2285,2983.7 2381.85,2886.85 R3_11.1@2465,2886.85
NetM0_12_1: M0_12.1 R0_12.2 | length 400
  Top Layer w10: M0_12.1@4831.3,527.6 4939.9,527.6 4962.3,550 4962.3,674 4866.3,770
NetM0_12_3: M0_12.3 R2_12.2 R3_12.1 | length 707.4
  Top Layer w10: R2_12.2@4471.3,988.7 4582.6,988.7 4651.3,920 R3_12.1@4651.3,526.85 4689.45,565 M0_12.3@4741.3,565
NetM0_13_1: M0_13.1 R0_13.2 | length 317.1
  Top Layer w10: R0_13.2@3425,705 3425,805 3502.6,882.6 M0_13.1@3610,882.6
NetM0_13_3: M0_13.3 R2_13.2 R3_13.1 | length 1024.2
  Top Layer w10: M0_13.3@3520,920 3633.5,920 3640.07,913.43 3640.14,913.43 3646,907.57 3646,791 R3_13.1@3580,725
  Bottom Layer w10: 3195,201.3 3195,340 R3_13.1@3580,725
NetM0_14_1: M0_14.1 R0_14.2 | length 360.1
  Top Layer w10: M0_14.1@2279.76,527.6 2372.6,527.6 2410.86,565.86 2410.86,639.14 2365,685 R0_14.2@2290,685
NetM0_14_3: M0_14.3 R2_14.2 R3_14.1 | length 707.4
  Top Layer w10: R2_14.2@1919.76,988.7 2031.06,988.7 2099.76,920 R3_14.1@2099.76,526.85 2137.91,565 M0_14.3@2189.76,565
NetM0_15_1: M0_15.1 R0_15.2 | length 268.7
  Top Layer w10: R0_15.2@900,1330 970,1400 1072.4,1400 M0_15.1@1120,1447.6
NetM0_15_3: M0_15.3 R2_15.2 R3_15.1 | length 1115.7
  Top Layer w10: R3_15.1@540.75,1717.4 542.6,1717.4 591.74,1668.26 921.74,1668.26 1025,1565 1025,1490 M0_15.3@1030,1485
  Bottom Layer w10: R2_15.2@153.9,1477.4 300.75,1477.4 R3_15.1@540.75,1717.4
NetQ0_1: Q0.1 U0.38 | length 1095.4
  Top Layer w10: U0.38@3530.47,1909.84 3530.47,1814.53 3569.96,1775.04 3870.25,1775.04 4023,1622.3 4023,1499.64 4033.2,1489.45 Q0.1@4324.02,1489.45
NetQ1_1: Q1.1 U1.38 | length 1497.1
  Top Layer w10: U1.38@2924.53,3610.16 2924.53,3545.47 v1(3000,3470) ; v1(3115,3360) 3234.28,3240.72 3699.28,3240.72 3993,3534.45 Q1.1@4109.02,3534.45
  Bottom Layer w10: v1(3000,3470) 3003.79,3470 3010.38,3463.41 3011.59,3463.41 v1(3115,3360)
NetR2_1: R2.1 U0.2 U0.4 | length 412.1
  Top Layer w10: R2.1@3353.15,1345 3353.15,1492 3353.31,1492.16 3353.31,1540.92 ; U0.2@3353.31,1640.16 3353.31,1540.92 ; U0.4@3392.68,1640.16 3392.68,1578 3355.6,1540.92 3353.31,1540.92
NetR4_2: R4.2 R5.1 U0.46 | length 519.4
  Top Layer w10: R5.1@3100,1728.39 3100,1820 ; 3100,1900.55 3100,1820 ; U0.46@3372.99,1909.84 3372.99,1846.61 3346.38,1820 3100,1820
NetR5_2: R5.2 U0.45 | length 404.3
  Top Layer w10: R5.2@3100,1646.61 3100,1647.68 3125.51,1673.19 3126.57,1673.19 3253.39,1800 3360,1800 3392.68,1832.68 U0.45@3392.68,1866.61
NetR42_1: R42.1 U1.2 U1.4 U1.6 | length 939.2
  Top Layer w10: U1.6@3022.95,3879.84 U1.6@3022.95,3879.84 3023.03,3879.92 3023.03,3928.89 3036.14,3942 3060,3942 ; U1.4@3062.32,3879.84 3062.32,3939.68 3060,3942 ; U1.2@3101.69,3879.84 3101.69,3940.31 3100,3942 ; R42.1@3375,3755 3408,3722 3408,3642 3395,3629 3349,3629 3320,3658 3320,3849 3227,3942 3100,3942 ; 3060,3942 3100,3942
NetR44_2: R44.2 R45.1 U1.46 | length 921.6
  Top Layer w10: R45.1@2335,3658.39 R45.1@2335,3675 ; R44.2@2335,3748.9 R45.1@2335,3676.1 2501.1,3676.1 2530,3705 3045,3705 3082.01,3667.99 U1.46@3082.01,3610.16
NetR45_2: R45.2 U1.45 | length 837.2
  Top Layer w10: R45.2@2335,3563.9 2336.1,3565 2414.54,3565 2478.54,3629 2479.46,3629 2535.46,3685 3036.45,3685 3062.24,3659.2 3062.24,3610.24 U1.45@3062.32,3610.16
Out2-A: J1.1 T2.4 | length 335.7
  Top Layer w10: J1.1@930,4325 1195,4325 T2.4@1245,4275
Out2-B: J1.2 T2.3 | length 346.9
  Top Layer w10: J1.2@930,4443.11 1245,4443.11 T2.3@1245,4475
TopMuxTerm: C0_8.1 R14.1 U0.14 U0.16 | length 3300.9
  Top Layer w10: U0.14@3589.53,1640.16 3589.53,1699.67 3628.9,1739.04 ; U0.16@3628.9,1640.16 3628.9,1739.04 ; v1(4650,1420) 4045.91,1420 3986,1479.91 3986,1605.82 3852.77,1739.04 3628.9,1739.04 ; v1(5328.32,1816.68) 5408.68,1816.68 5506,1914 5506,2414 C0_8.1@5450,2470 R14.1@5450,2690
  Bottom Layer w10: v1(4650,1420) 4931.64,1420 v1(5328.32,1816.68)
TopMuxTerm-2: R58.1 U1.14 U1.16 | length 945.9
  Top Layer w10: U1.14@2865.47,3879.84 2865.47,3815.86 2859.61,3810 2831.96,3810 2826.1,3815.86 2826.1,4556.1 R58.1@2895,4625
Vbot: C0.1 C0_15.1 C1.2 C2.1 C3.1 C4.1 C14.2 C22.1 C23.1 D0_15.2 F0.2 J2.2 J2.4 J2.6 J3.0 J4.0 J5.0 pad.12 pad.14 R2_15.1 R4.1 U0.26 U0.30 U0.31 | length 2354.8
  Top Layer w10: F0.2@1185.24,2430 v1(1270,2430) ; v1(3075,1570) C0.1@3130.04,1570 ; 3100,1969.45 3100.55,1970 v1(3180,1970) ; U0.31@3668.27,1909.84 U0.30@3687.95,1909.84 U0.30@3687.95,1909.84 3688.03,1860.8 3701.79,1847.04 3756.04,1847.04 ; U0.26@3766.69,1909.84 3766.61,1909.76 3766.61,1857.61 3756.04,1847.04 ; v1(3914.82,1915.18) 3846.69,1847.04 3756.04,1847.04 ; C4.1@4170,1980 4220,1980 v1(4261,1939) ; C3.1@4172.99,1890 4212,1890 v1(4261,1939) ; C1.2@4552.48,1580 4553,1580 4553,1670 C2.1@4551.5,1670 4550,1671.5 v1(4550,1725) 4275,1725 4261,1739 v1(4261,1939) ; v1(5480,1195) J2.2@5640,1195 ; v1(5485,720) 5637.44,720 J2.6@5640,722.56 ; v1(5485,960) 5638.78,960 J2.4@5640,958.78
  Bottom Layer w10: R2_15.1@941.3,1477.4 1002.6,1477.4 D0_15.2@1247.6,1722.4
  other v1: 4820.24,798.99 5480.24,1193.99
Vmid: C0_7.1 C16.1 C17.1 C18.2 C19.1 C20.1 C21.1 C24.1 C25.1 D0_7.2 F0_11.1 M0_11.2 pad.11 pad.13 R0.2 R1_11.2 R2.2 R2_7.1 R3.2 R44.1 U1.26 U1.30 U1.31 | length 10766.6
  Top Layer w10: R44.1@2335,3861.1 v1(2335,3925) ; U1.26@2688.31,3610.16 v1(2688.31,3520) 2727,3520 2767.05,3560.05 U1.30@2767.05,3610.16 U1.31@2786.73,3610.16 2786.73,3555 ; F0_11.1@2720.24,2430 2722.83,2432.6 M0_11.2@2815,2432.6 ; C21.1@2766.5,3375 2766.5,3425.76 2786.73,3446 2786.73,3555 ; M0_11.2@2806.57,2429.52 2722.05,2345 2720,2345 ; C20.1@2986.5,3380 2986.5,3340.5 2923,3277 2693,3277 2664,3306 2664,3432.27 2786.73,3555 ; C17.1@3632.48,3465 3860,3465 3972,3577 4162,3577 4162,3491 4076,3491 3610,3025 3217,3025 3075,2883 R0.2@3075,2241.85 3073.15,2240 2825,2240 2720,2345 ; R2.2@3648.15,1345 3648.15,1343.15 3556,1251 2770,1251 2648,1373 1523,1373 1480,1416 1480,1653 1538,1711 1975.09,1711 2474.09,2210 2585,2210 2720,2345 ; R3.2@4320,3215 4320,3420 4352.48,3452.48 4352.48,3714.02 C19.1@4351.5,3715
  Bottom Layer w10: C16.1@1930,3550 2108,3550 2786,2872 2786,2411 2720,2345
Vref1: C3.2 R35.2 R36.2 R37.2 U0.35 | length 3043.7
  Top Layer w10: C3.2@4110,1890 3960,1890 3881.04,1811.04 3613.96,1811.04 3589.53,1835.47 3589.53,2059.53 3750,2220 4290,2220 4365,2145 4365,1885 4397,1853 4577,1853 4705,1725 v1(4705,1705) ; R37.2@4880,1657.72 v1(4880,1705) ; v1(5085,1705) R36.2@5085,1651.1 5086.1,1650 5298.9,1650 R35.2@5300,1651.1
  Bottom Layer w10: v1(4705,1705) v1(4880,1705) v1(5085,1705)
Vtop: F0_1.1 M0_1.2 R1_1.2 R41.2 R42.2 R43.2 | length 3961.6
  Top Layer w10: R41.2@3375,3661.85 3338,3698.85 3338,3914.85 3375,3951.85 ; R43.2@4696.85,3585 4850.85,3431 5642.42,3431 5865.24,3653.82 ; M0_1.2@6155,3952.6 5867.64,3952.6 F0_1.1@5865.24,3955 5865.24,3653.82 ; R1_1.2@6160,3470 5976.18,3653.82 5865.24,3653.82
  Bottom Layer w10: R41.2@3375,3661.85 4620,3661.85 R43.2@4696.85,3585
pads on no net: J0. J1. J2. U0.3 U0.5 U0.15 U0.17 U0.32 U0.33 U0.36 U0.39 U0.40 U0.43 U0.44 U1.3 U1.5 U1.7 U1.15 U1.17 U1.27 U1.28 U1.29 U1.32 U1.33 U1.36 U1.39 U1.40 U1.43 U1.44

## Polygon pours and split planes (outlines as drawn)
Vbot on Bottom Layer "VBOT_L02_P001" (solid, remove dead copper, pour order 1): 75,2600 1750,2600 2225,3075 6300,3075 6300,75 1275,75 1275,1050 1100,1225 75,1225
Vmid on Bottom Layer "VMID_L02_P005" (solid, remove dead copper, pour order 5): 75,2650 1725,2650 2225,3150 6300,3150 6300,4125 5295,4125 5125,4295 5125,5275 75,5275

## Silkscreen, mask and mechanical layers (free items; w line width, h text height)
Top Overlay:
  circle w10: c1450,250 r105
  circle w10: c4810,3845 r105
  lines w10: 70,4655 70,5285 1715,5285 1715,4655 70,4655 ; 75,2695 620,2695 620,3420 910,3420 910,3730 1010,3730 1010,3965 75,3965 75,2695 ; 100,1210 100,1980 1400,1980 1400,1210 100,1210 ; 640,2595 640,2635 640,3395 935,3395 935,3705 1330,3705 1330,3095 1715,3095 1715,2595 640,2595 ; 1695,89.88 2715,89.88 2715,1030 1695,1030 1695,89.88 ; 1720,4045 2660,4045 2660,5205 1720,5205 1720,4045 ; 2145,1850 2930,1850 2930,3144.88 2145,3144.88 2145,1850 ; 2985,4175 4110,4175 4110,5125 2985,5125 2985,4175 ; 2990,79.88 4085,79.88 4085,1270 2990,1270 2990,79.88 ; 3225,2145 4226.91,2145 4226.91,3185 3225,3185 3225,2145 ; 4250,114.88 5270,114.88 5270,1305 4250,1305 4250,114.88 ; 4255,4030 5145,4030 5145,5150 4255,5150 4255,4030 ; 4371.91,1885 5235,1885 5235,3065 4371.91,3065 4371.91,1885 ; 4990,3380 4990,3940 5335,3940 5335,4165 6350,4165 6350,3380 4990,3380 ; 5295,1870 6220,1870 6220,3060 5295,3060 5295,1870
  text "Cell 2" at 4265,5168.15 h200
  text "Cell 3" at 2980,5153.15 h200
  text "Cell 5" at 105,4534.44 h200
  text "Cell 4" at 1715,3903.15 h200
  text "+" at 4745,3746.68 h200
  text "Cell 7" at 1020,3734.63 h200
  text "Cell 1" at 5920,3238.15 h200
  text "Cell 9" at 3225,3191.66 h200
  text "Cell 8" at 2145,3163.7 h200
  text "Cell 10" at 4535,3088.15 h200
  text "Cell 11" at 5300,3083.15 h200
  text "Cell 6" at 120,2550 h200
  text "Cell 15" at 95,1994.44 h200
  text "Cell 12" at 4325,1318.15 h200
  text "Cell 13" at 2905,1308.15 h200
  text "Cell 14" at 1700,1048.15 h200
  text "-" at 1385,150.03 h200